# Altium PCB 8ch_RGB_Controller.PcbDoc (part 1 of 2)
Units mm, origin at the board's own origin, x right, y up, seen from the top; angles counter-clockwise.
Board outline 60 x 60 mm, 2 copper layers (Top Layer, Bottom Layer), stack 0.781 mm thick; 107 components, 106 nets, 314 pads, 0 vias.
Unrouted connection lines stored in the file: 228.
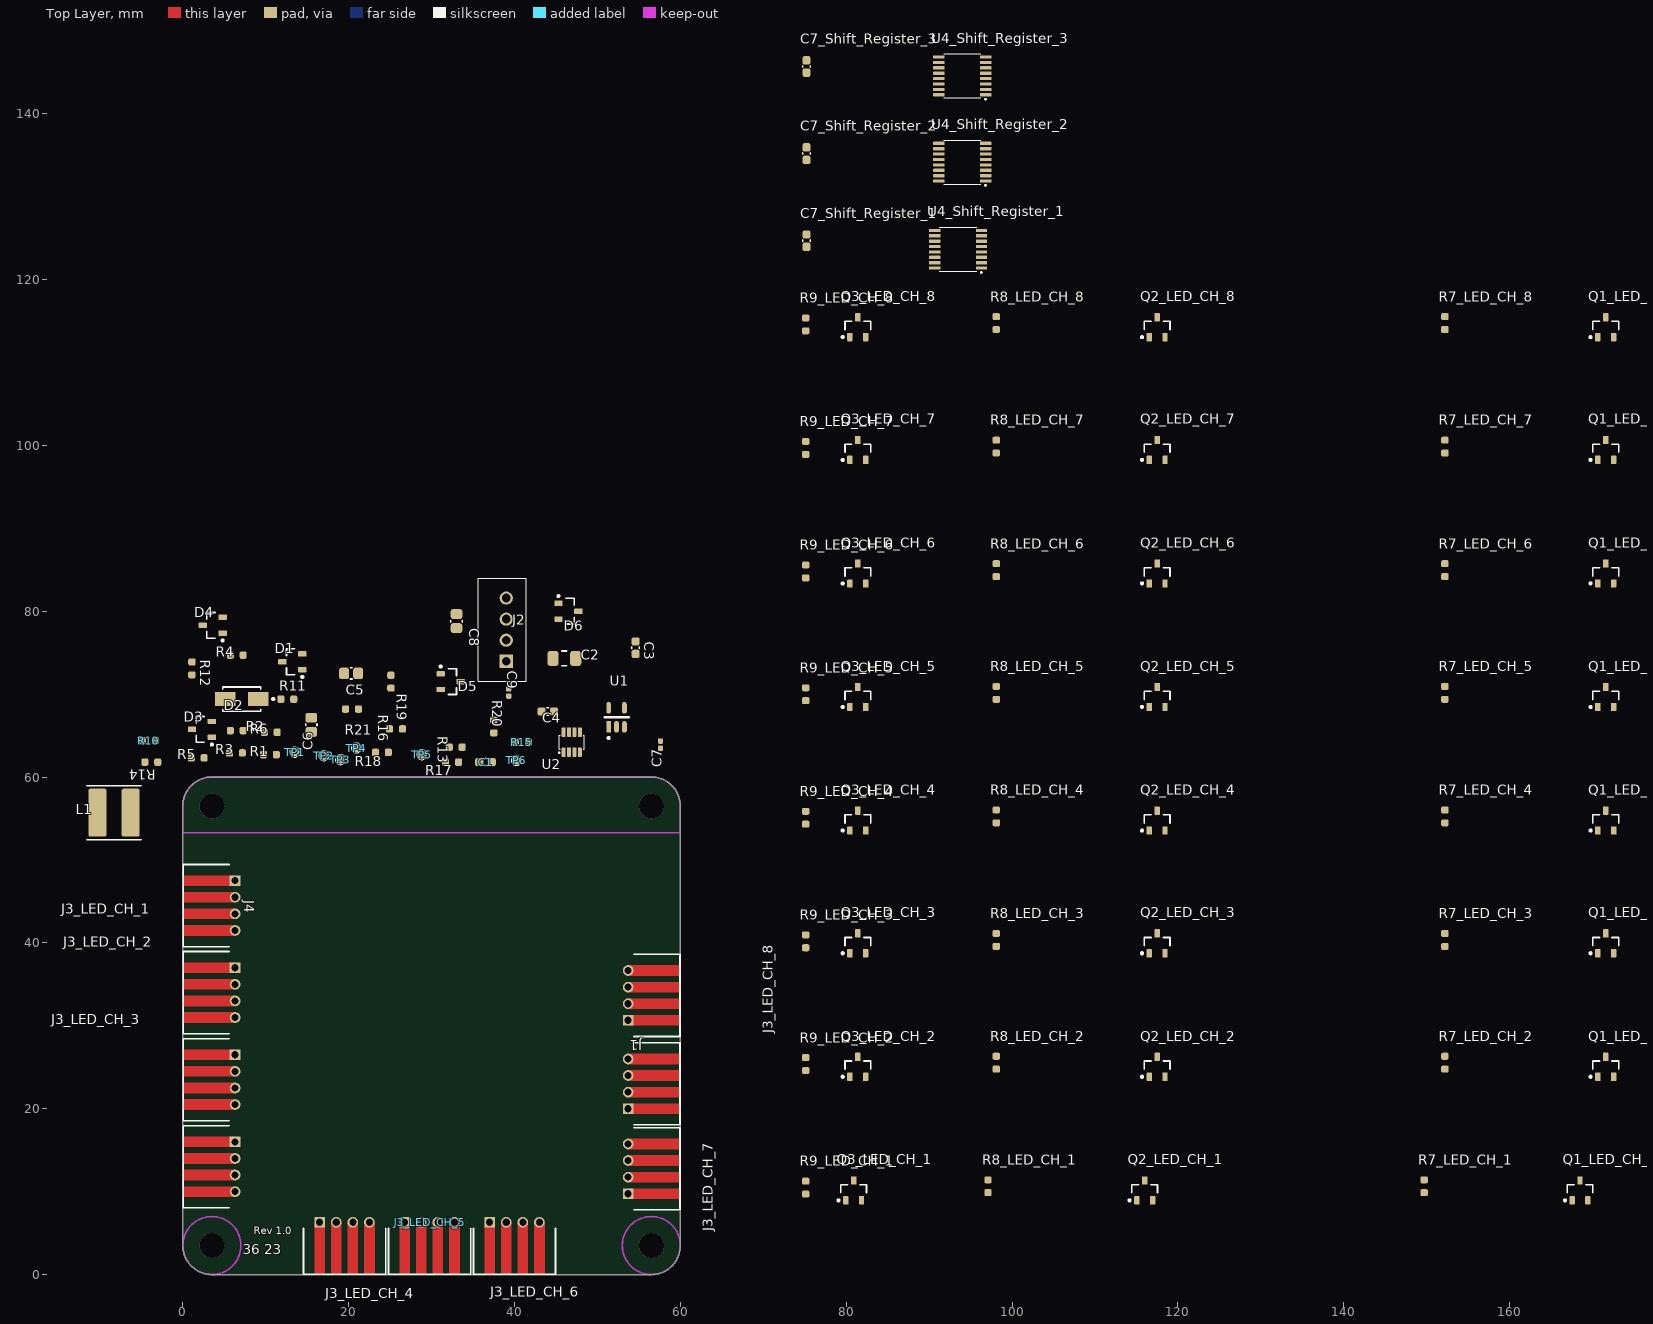
[diagram p0: Top Layer view]
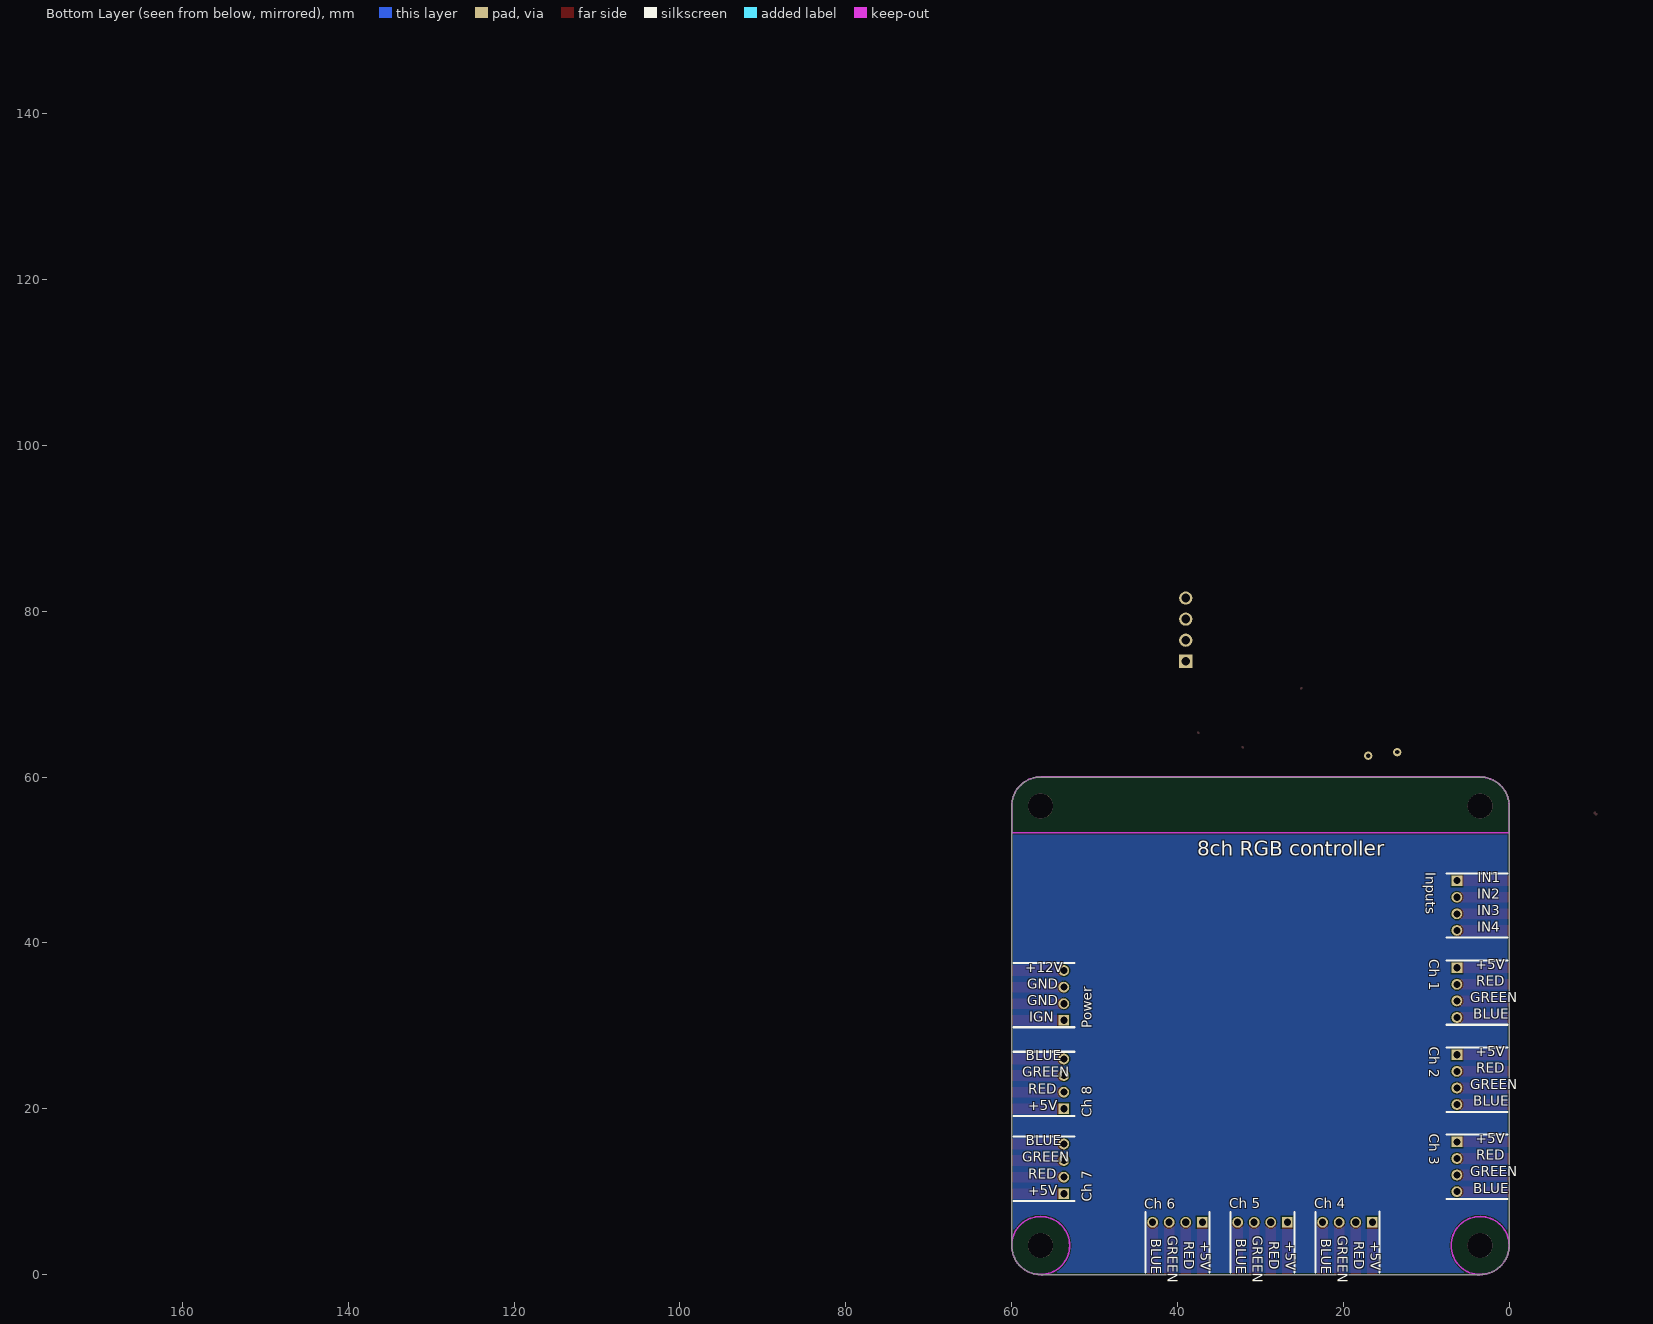
[diagram p1: Bottom Layer view, seen from below]

## Layer stack, top to bottom
Top Solder: solder mask 0.0102, Solder Resist, Dk 3.5
Top Layer: signal copper 0.035
Dielectric 1: core 0.7112, Core-039, Dk 4.8
Bottom Layer: signal copper 0.035
Bottom Solder: solder mask 0.0102, Solder Resist, Dk 3.5

## Board outline
0.001,3.5 0.001,56.5 0,56.5 cw(c3.5,56.5) 3.5,60 3.5,59.999 56.5,59.999 56.5,60 cw(c56.5,56.5) 60,56.5 60,3.5 cw(c56.5,3.5) 56.5,0 3.5,0 cw(c3.5,3.5)

## Design rules (kind name [scope] priority, off if disabled: settings)
BoardOutlineClearance [All] p1: gap=0.2 ignorepadtopadclearanceinfootprint=FALSE
Clearance [All] p1: gap=0.127 ignorepadtopadclearanceinfootprint=FALSE except(0.25: Arc-Hole Track-Hole SMDPad-Hole THPad-Hole Via-Hole Fill-Hole Poly-Hole Region-Hole Text-Hole)
ComponentClearance [All] p1: gap=0.127 collisioncheckmode=3 verticalgap=0.127 showdistances=TRUE
DiffPairsRouting [All] p1: maxlimit=0.254 minlimit=0.127 mostfreqgap=0.127 toplayer_minwidth=0.127 toplayer_maxwidth=25.4 toplayer_prefwidth=0.127 bottomlayer_minwidth=0.127 bottomlayer_maxwidth=25.4 bottomlayer_prefwidth=0.127 maxuncoupledlength=12.7
Height [All] p1: minheight=0 maxheight=1816.048 prefheight=12.7
HoleSize [All] p1: absolutevalues=TRUE maxlimit=6.3 minlimit=0.3 maxpercent=80.000 minpercent=20.000
HoleToHoleClearance [All] p1: gap=0.25 allowstackedmicrovias=FALSE
MinimumAnnularRing [All] p1: minimumring=0.076
MinimumSolderMaskSliver [All] p1: minsoldermaskwidth=0
PlaneClearance [All] p1: clearance=0.127
PlaneConnect PlaneConnectPowerPads [InPadClass('PowerPads')] p1: planeconnectstyle=Direct reliefexpansion=0.508 reliefentries=4 reliefconductorwidth=0.254 reliefairgap=0.254
PlaneConnect [All] p2: pad.planeconnectstyle=Relief pad.reliefexpansion=0.3 pad.reliefentries=4 pad.reliefconductorwidth=0.127 pad.reliefairgap=0.127 via.planeconnectstyle=Direct via.reliefexpansion=0.3 via.reliefentries=4 via.reliefconductorwidth=0.127 via.reliefairgap=0.127
PolygonConnect PolygonConnectPowerPads [All vs (InPadClass('PowerPads'))] p1: connectstyle=Direct reliefconductorwidth=0.254 reliefentries=4 polygonreliefangle="90 Angle" airgapwidth=0.254
PolygonConnect [All] p2: thpad.connectstyle=Relief thpad.reliefconductorwidth=0.127 thpad.reliefentries=4 thpad.polygonreliefangle="90 Angle" thpad.airgapwidth=0.127 smdpad.connectstyle=Relief smdpad.reliefconductorwidth=0.127 smdpad.reliefentries=4 smdpad.polygonreliefangle="90 Angle" smdpad.airgapwidth=0.127 via.connectstyle=Direct via.reliefconductorwidth=0.127 via.reliefentries=4 via.polygonreliefangle="90 Angle" via.airgapwidth=0.127
RoutingVias [All] p1: holewidth=0.3 width=0.6 viastyle="Through Hole" minholewidth=0.3 minwidth=0.6 maxholewidth=0.6 maxwidth=6.6
SilkToSilkClearance [All] p1: silktosilkclearance=0
SilkToSolderMaskClearance [IsPad] p1: minsilkscreentomaskgap=0.127 clearancetoexposedcopper=TRUE
SolderMaskExpansion [All] p1: expansion=0.075 istentingtop=FALSE
Width [All] p1: maxlimit=25.4 minlimit=0.127 preferedwidth=0.127 minimp=50.000000 maximp=50.000000 favimp=50.000000
20 further rules are at their usual default settings.

## Classes and differential pairs
channel class Shift_Register: Shift_Register_1 Shift_Register_2 Shift_Register_3
component class Shift_Register_3: C7_Shift_Register_3 U4_Shift_Register_3
component class Shift_Register_2: C7_Shift_Register_2 U4_Shift_Register_2
component class Shift_Register_1: C7_Shift_Register_1 U4_Shift_Register_1
channel class LED_CH: LED_CH_1 LED_CH_2 LED_CH_3 LED_CH_4 LED_CH_5 LED_CH_6 LED_CH_7 LED_CH_8
component class MCU: C7 C8 C9 J2
component class LED_CH_8: J3_LED_CH_8 Q1_LED_CH_8 Q2_LED_CH_8 Q3_LED_CH_8 R7_LED_CH_8 R8_LED_CH_8 R9_LED_CH_8
component class LED_CH_7: J3_LED_CH_7 Q1_LED_CH_7 Q2_LED_CH_7 Q3_LED_CH_7 R7_LED_CH_7 R8_LED_CH_7 R9_LED_CH_7
component class LED_CH_6: J3_LED_CH_6 Q1_LED_CH_6 Q2_LED_CH_6 Q3_LED_CH_6 R7_LED_CH_6 R8_LED_CH_6 R9_LED_CH_6
component class LED_CH_5: J3_LED_CH_5 Q1_LED_CH_5 Q2_LED_CH_5 Q3_LED_CH_5 R7_LED_CH_5 R8_LED_CH_5 R9_LED_CH_5
component class LED_CH_4: J3_LED_CH_4 Q1_LED_CH_4 Q2_LED_CH_4 Q3_LED_CH_4 R7_LED_CH_4 R8_LED_CH_4 R9_LED_CH_4
component class LED_CH_3: J3_LED_CH_3 Q1_LED_CH_3 Q2_LED_CH_3 Q3_LED_CH_3 R7_LED_CH_3 R8_LED_CH_3 R9_LED_CH_3
component class LED_CH_2: J3_LED_CH_2 Q1_LED_CH_2 Q2_LED_CH_2 Q3_LED_CH_2 R7_LED_CH_2 R8_LED_CH_2 R9_LED_CH_2
component class LED_CH_1: J3_LED_CH_1 Q1_LED_CH_1 Q2_LED_CH_1 Q3_LED_CH_1 R7_LED_CH_1 R8_LED_CH_1 R9_LED_CH_1
component class Analog: D3 D4 D5 D6 J4 R10 R11 R12 R13 R14 R15 R16 R17 R18 R19 R20 R21 TP3 TP4 TP5 TP6
component class Power: C1 C2 C3 C4 C5 C6 D1 D2 J1 L1 R2 R3 R4 R5 R6 TP1 TP2 U1 U2

## Components (designator, comment, footprint, x,y, rotation, side; value= is the part's Value field where it differs from the comment)
C1 "GRM185R61C105KE44D" CAPC1608X08N 36.5,61.8 r180 top
C2 "CL31A106KAHNNNE" CAPC3216X16N 46,74.3 r180 top
C3 "CC0603KRX7R9BB103" CAPC1608X08N 54.6,75.6 r90 top
C4 "GRM185R61C105KE44D" CAPC1608X08N 44,67.9 r180 top
C5 "CL21B106KOQNNNE" CAPC2012X13N 20.3,72.5 r180 top
C6 "CL21B106KOQNNNE" CAPC2012X13N 15.5,66.3 r90 top
C7 "CC0402KRX7R7BB104" CAPC1005X05N 57.6,63.9 r270 top
C7_Shift_Register_1 "CL10B104KO8NNNC" CAPC1608X08N 75.212,124.688 r90 top (schematic designator C7)
C7_Shift_Register_2 "CL10B104KO8NNNC" CAPC1608X08N 75.212,135.188 r90 top (schematic designator C7)
C7_Shift_Register_3 "CL10B104KO8NNNC" CAPC1608X08N 75.212,145.687 r90 top (schematic designator C7)
C8 "CL21B106KOQNNNE" CAPC2012X13N 33,78.8 r270 top
C9 "CC0402KRX7R7BB104" CAPC1005X05N 39.3,70.2 r270 top
D1 "BAT54SLT1G" SOT95P237X112-3N 13.2,73.9 r180 top
D2 "B330A-13-F" FP-SMA-MFG 7.1,69.4 r180 top value=200pF
D3 "BAV99LT1G" SOT95P237X112-3N 2.3,65.75 r180 top
D4 "BAV99LT1G" SOT95P237X112-3N 3.6,78.3 r180 top
D5 "BAV99LT1G" SOT95P237X112-3N 32.3,71.5 r0 top
D6 "BAV99LT1G" SOT95P237X112-3N 46.5,80 r0 top
J1 "S4B-PH-K-S" S4B-PH-K-S 53.7,30.665 r90 top
J2 "B4B-XH-A(LF)(SN)" B4B-XH-A 39,73.96 r90 top
J3_LED_CH_1 "S4B-PH-K-S" S4B-PH-K-S 6.3,37 r270 top (schematic designator J3)
J3_LED_CH_2 "S4B-PH-K-S" S4B-PH-K-S 6.3,26.5 r270 top (schematic designator J3)
J3_LED_CH_3 "S4B-PH-K-S" S4B-PH-K-S 6.3,16 r270 top (schematic designator J3)
J3_LED_CH_4 "S4B-PH-K-S" S4B-PH-K-S 16.5,6.3 r0 top (schematic designator J3)
J3_LED_CH_5 "S4B-PH-K-S" S4B-PH-K-S 26.75,6.3 r0 top (schematic designator J3)
J3_LED_CH_6 "S4B-PH-K-S" S4B-PH-K-S 37,6.3 r0 top (schematic designator J3)
J3_LED_CH_7 "S4B-PH-K-S" S4B-PH-K-S 53.7,9.75 r90 top (schematic designator J3)
J3_LED_CH_8 "S4B-PH-K-S" S4B-PH-K-S 53.7,20 r90 top (schematic designator J3)
J4 "S4B-PH-K-S" S4B-PH-K-S 6.3,47.5 r270 top
L1 "CMLF0504-2R2MTT" INDP5852X48N -8.3,55.7 r180 top
Q1_LED_CH_1 "AO3400A" SOT95P237X112-3N 168.499,10.15 r90 top (schematic designator Q1)
Q1_LED_CH_2 "AO3400A" SOT95P237X112-3N 171.599,25.05 r90 top (schematic designator Q1)
Q1_LED_CH_3 "AO3400A" SOT95P237X112-3N 171.599,39.95 r90 top (schematic designator Q1)
Q1_LED_CH_4 "AO3400A" SOT95P237X112-3N 171.599,54.75 r90 top (schematic designator Q1)
Q1_LED_CH_5 "AO3400A" SOT95P237X112-3N 171.599,69.65 r90 top (schematic designator Q1)
Q1_LED_CH_6 "AO3400A" SOT95P237X112-3N 171.599,84.55 r90 top (schematic designator Q1)
Q1_LED_CH_7 "AO3400A" SOT95P237X112-3N 171.599,99.45 r90 top (schematic designator Q1)
Q1_LED_CH_8 "AO3400A" SOT95P237X112-3N 171.599,114.25 r90 top (schematic designator Q1)
Q2_LED_CH_1 "AO3400A" SOT95P237X112-3N 115.999,10.15 r90 top (schematic designator Q2)
Q2_LED_CH_2 "AO3400A" SOT95P237X112-3N 117.499,25.05 r90 top (schematic designator Q2)
Q2_LED_CH_3 "AO3400A" SOT95P237X112-3N 117.499,39.95 r90 top (schematic designator Q2)
Q2_LED_CH_4 "AO3400A" SOT95P237X112-3N 117.499,54.75 r90 top (schematic designator Q2)
Q2_LED_CH_5 "AO3400A" SOT95P237X112-3N 117.499,69.65 r90 top (schematic designator Q2)
Q2_LED_CH_6 "AO3400A" SOT95P237X112-3N 117.499,84.55 r90 top (schematic designator Q2)
Q2_LED_CH_7 "AO3400A" SOT95P237X112-3N 117.499,99.45 r90 top (schematic designator Q2)
Q2_LED_CH_8 "AO3400A" SOT95P237X112-3N 117.499,114.25 r90 top (schematic designator Q2)
Q3_LED_CH_1 "AO3400A" SOT95P237X112-3N 80.899,10.15 r90 top (schematic designator Q3)
Q3_LED_CH_2 "AO3400A" SOT95P237X112-3N 81.399,25.05 r90 top (schematic designator Q3)
Q3_LED_CH_3 "AO3400A" SOT95P237X112-3N 81.399,39.95 r90 top (schematic designator Q3)
Q3_LED_CH_4 "AO3400A" SOT95P237X112-3N 81.399,54.75 r90 top (schematic designator Q3)
Q3_LED_CH_5 "AO3400A" SOT95P237X112-3N 81.399,69.65 r90 top (schematic designator Q3)
Q3_LED_CH_6 "AO3400A" SOT95P237X112-3N 81.399,84.55 r90 top (schematic designator Q3)
Q3_LED_CH_7 "AO3400A" SOT95P237X112-3N 81.399,99.45 r90 top (schematic designator Q3)
Q3_LED_CH_8 "AO3400A" SOT95P237X112-3N 81.399,114.25 r90 top (schematic designator Q3)
R1 "RC0603FR-13100KL" RESC1608X06N#1 10.5,62.7 r180 top
R2 "RC0603FR-0749R9L" RESC1608X06N#1 6.5,65.6 r180 top
R3 "RC0603FR-13100KL" RESC1608X06N#1 6.4,62.9 r180 top
R4 "RC0603FR-0713K7L" RESC1608X06N#1 6.5,74.7 r180 top
R5 "RC0603FR-074K99P" RESC1608X06N#1 1.8,62.3 r0 top
R6 "RC0603JR-0710KL" RESC1608X06N#1 10.6,65.4 r0 top
R7_LED_CH_1 "RC0603JR-0710KL" RESC1608X06N#1 149.699,10.65 r90 top (schematic designator R7)
R7_LED_CH_2 "RC0603JR-0710KL" RESC1608X06N#1 152.199,25.55 r90 top (schematic designator R7)
R7_LED_CH_3 "RC0603JR-0710KL" RESC1608X06N#1 152.199,40.35 r90 top (schematic designator R7)
R7_LED_CH_4 "RC0603JR-0710KL" RESC1608X06N#1 152.199,55.25 r90 top (schematic designator R7)
R7_LED_CH_5 "RC0603JR-0710KL" RESC1608X06N#1 152.199,70.15 r90 top (schematic designator R7)
R7_LED_CH_6 "RC0603JR-0710KL" RESC1608X06N#1 152.199,84.95 r90 top (schematic designator R7)
R7_LED_CH_7 "RC0603JR-0710KL" RESC1608X06N#1 152.199,99.85 r90 top (schematic designator R7)
R7_LED_CH_8 "RC0603JR-0710KL" RESC1608X06N#1 152.199,114.75 r90 top (schematic designator R7)
R8_LED_CH_1 "RC0603JR-0710KL" RESC1608X06N#1 97.099,10.65 r90 top (schematic designator R8)
R8_LED_CH_2 "RC0603JR-0710KL" RESC1608X06N#1 98.099,25.55 r90 top (schematic designator R8)
R8_LED_CH_3 "RC0603JR-0710KL" RESC1608X06N#1 98.099,40.35 r90 top (schematic designator R8)
R8_LED_CH_4 "RC0603JR-0710KL" RESC1608X06N#1 98.099,55.25 r90 top (schematic designator R8)
R8_LED_CH_5 "RC0603JR-0710KL" RESC1608X06N#1 98.099,70.15 r90 top (schematic designator R8)
R8_LED_CH_6 "RC0603JR-0710KL" RESC1608X06N#1 98.099,84.95 r90 top (schematic designator R8)
R8_LED_CH_7 "RC0603JR-0710KL" RESC1608X06N#1 98.099,99.85 r90 top (schematic designator R8)
R8_LED_CH_8 "RC0603JR-0710KL" RESC1608X06N#1 98.099,114.75 r90 top (schematic designator R8)
R9_LED_CH_1 "RC0603JR-0710KL" RESC1608X06N#1 75.112,10.488 r90 top (schematic designator R9)
R9_LED_CH_2 "RC0603JR-0710KL" RESC1608X06N#1 75.112,25.388 r90 top (schematic designator R9)
R9_LED_CH_3 "RC0603JR-0710KL" RESC1608X06N#1 75.112,40.188 r90 top (schematic designator R9)
R9_LED_CH_4 "RC0603JR-0710KL" RESC1608X06N#1 75.112,55.088 r90 top (schematic designator R9)
R9_LED_CH_5 "RC0603JR-0710KL" RESC1608X06N#1 75.112,69.988 r90 top (schematic designator R9)
R9_LED_CH_6 "RC0603JR-0710KL" RESC1608X06N#1 75.112,84.788 r90 top (schematic designator R9)
R9_LED_CH_7 "RC0603JR-0710KL" RESC1608X06N#1 75.112,99.688 r90 top (schematic designator R9)
R9_LED_CH_8 "RC0603JR-0710KL" RESC1608X06N#1 75.112,114.588 r90 top (schematic designator R9)
R10 "RC0603FR-073K3L" RESC1608X06N#1 -4.1,64.4 r180 top
R11 "RC0603FR-073K3L" RESC1608X06N#1 12.6,69.4 r180 top
R12 "RC0603FR-073K3L" RESC1608X06N#1 1.1,73.1 r90 top
R13 "RC0603FR-073K3L" RESC1608X06N#1 32.9,63.6 r180 top
R14 "RC0603FR-071K24L" RESC1608X06N#2 -3.8,61.8 r0 top
R15 "RC0603FR-071K24L" RESC1608X06N#1 40.9,64.2 r180 top
R16 "RC0603FR-071K24L" RESC1608X06N#1 25.7,65.8 r180 top
R17 "RC0603FR-071K24L" RESC1608X06N#1 32.475,61.8 r180 top
R18 "RC0603JR-07100RL" RESC1608X06N#1 24,62.964 r0 top
R19 "RC0603JR-07100RL" RESC1608X06N#1 25.1,71.5 r270 top
R20 "RC0603JR-07100RL" RESC1608X06N#1 37.5,66.1 r270 top
R21 "RC0603JR-07100RL" RESC1608X06N#1 20.4,68.2 r180 top
TP1 "TP_TH_1MM" TP_TH_1MM_N 13.5,63 r90 top
TP2 "TP_TH_1MM" TP_TH_1MM_N 17,62.573 r90 top
TP3 "TP_SMD_1MM" TP_SMD_1MM_N 19,62.1 r90 top
TP4 "TP_SMD_1MM" TP_SMD_1MM_N 20.9,63.5 r90 top
TP5 "TP_SMD_1MM" TP_SMD_1MM_N 28.8,62.7 r90 top
TP6 "TP_SMD_1MM" TP_SMD_1MM_N 40.2,62 r90 top
U1 "AP2204K-3.3TRG1" FP-SOT25-IPC_B 52.3,67.2 r90 top
U2 "SY8303AIC" SOT65P280X110-8N 46.9,64.2 r0 top
U4_Shift_Register_1 "74HC595PW,118" SOP65P640X110-16N 93.499,123.65 r90 top (schematic designator U4)
U4_Shift_Register_2 "74HC595PW,118" SOP65P640X110-16N 93.999,134.15 r90 top (schematic designator U4)
U4_Shift_Register_3 "74HC595PW,118" SOP65P640X110-16N 93.999,144.55 r90 top (schematic designator U4)

## Footprints (in the part's own frame and the unit in brackets; to place one, negate y for a bottom-side part, rotate by r counter-clockwise, add the part's x,y. Pads: shape width x height; smd on the part's side, far side on the other; paste and mask are expansions set on the pad)
B4B-XH-A [mm] "Header, Vertical Shrouded, 2.54 mm pitch; 0.64 mm lead width, 4 pins, 1 row, 4 pins per row, 12.40 mm L X 5.75 mm W X 7.00 mm H body"
  rect 1.59x1.59 / inner round 1.59 / far side rect 1.59x1.59 hole 1.06: 1(0,0)
  round 1.59 hole 1.06 paste-2539.97: 2(2.54,0) 3(5.08,0) 4(7.62,0)
  silkscreen extent -2.39,-2.4 10.01,3.4, body extent -2.4,-2.38 10,3.38, height 7
CAPC1005X05N [mm] "Chip Capacitor, 2-Leads, Body 1.00x0.50mm, IPC Medium Density"
  rrect50% 0.66x0.62 smd: 1(-0.44,0) 2(0.44,0)
  body extent -0.55,-0.3 0.55,0.3, height 0.6
CAPC1608X08N [mm] "Chip Capacitor, 2-Leads, Body 1.60x0.80mm, IPC Medium Density"
  rrect50% 1x0.95 smd: 1(-0.75,0) 2(0.75,0)
  silkscreen extent -0.1,-0.45 0.1,0.45, body extent -0.85,-0.45 0.85,0.45, height 0.9
CAPC2012X13N [mm] "Chip Capacitor, 2-Leads, Body 2.00x1.25mm, IPC Medium Density"
  rrect50% 1.2x1.4 smd: 1(-0.85,0) 2(0.85,0)
  silkscreen extent -0.1,-0.67 0.1,0.67, body extent -1.05,-0.67 1.05,0.67, height 1.35
CAPC3216X16N [mm] "Chip Capacitor, 2-Leads, Body 3.20x1.60mm, IPC Medium Density"
  rrect50% 1.35x1.8 smd: 1(-1.375,0) 2(1.375,0)
  silkscreen extent -0.3,-0.9 0.3,0.9, body extent -1.7,-0.9 1.7,0.9, height 1.8
FP-SMA-MFG [mm]
  rect 2.5x1.7 smd paste+0 mask+0: 1(-2,0) 2(2,0)
  silkscreen extent -3.93,-1.46 2.3,1.46, body extent -3.35,-1.56 3.35,1.56, height 0.25
FP-SOT25-IPC_B [mm]
  rect 1.407x0.576 smd paste+0 mask+0: 1(-1.151,0.95)
  rrect100% 1.407x0.576 smd paste+0 mask+0: 2(-1.151,0) 3(-1.151,-0.95) 4(1.151,-0.95) 5(1.151,0.95)
  silkscreen extent -2.6,-1.5 0.05,1.5, body extent -2.1,-1.75 2.1,1.75, height 0.25
INDP5852X48N [mm] "Precision Wire Wound Inductor, 2-Leads, Body 5,80x5,20mm, IPC Medium Density"
  rrect25% 2.2x5.8 smd: 1(-2,0) 2(2,0)
  silkscreen extent -3.25,-3.25 3.25,3.25, body extent -2.96,-2.6 2.96,2.6, height 4.5
RESC1608X06N#1 [mm] "Chip Resistor, 2-Leads, Body 1,60x0,80mm, IPC Medium Density"
  rrect50% 0.85x0.9 smd: 1(-0.775,0) 2(0.775,0)
  body extent -0.85,-0.45 0.85,0.45, height 0.55
RESC1608X06N#2 [mm] "Chip Resistor, 2-Leads, Body 1,60x0,80mm, IPC Medium Density"
  rrect50% 0.85x0.9 smd mask-0.9: 1(-0.775,0) 2(0.775,0)
  body extent -0.85,-0.45 0.85,0.45, height 0.55
S4B-PH-K-S [mm] "Header, Right Angle Shrouded, 2.00 mm pitch; 0.50 mm lead width, 4 pins, 1 row, 4 pins per row, 9.90 mm L X 7.60 mm W X 4.80 mm H body"
  rect 1.29x1.29 / inner round 1.29 / far side rect 1.29x1.29 hole 0.86 paste-2539.97: 1(0,0)
  round 1.29 hole 0.86 paste-2539.97: 2(2,0) 3(4,0) 4(6,0)
  silkscreen extent -1.95,-6.25 7.95,-0.71, body extent -1.95,-6.25 7.95,1.35, height 4.8
SOP65P640X110-16N [mm] "Small Outline Pkg (SOP), 0.65 mm pitch; 16 pin, 5.00 mm L X 4.40 mm W X 1.10 mm H body"
  rrect25% 0.39x1.37 smd: 1(-2.275,-2.82) 2(-1.625,-2.82) 3(-0.975,-2.82) 4(-0.325,-2.82) 5(0.325,-2.82) 6(0.975,-2.82) 7(1.625,-2.82) 8(2.275,-2.82) 9(2.275,2.82) 10(1.625,2.82) 11(0.975,2.82) 12(0.325,2.82) 13(-0.325,2.82) 14(-0.975,2.82) 15(-1.625,2.82) 16(-2.275,2.82)
  silkscreen extent -2.87,-2.87 2.65,2.25, body extent -2.55,-3.3 2.55,3.3, height 1.1
SOT65P280X110-8N [mm] "Small Outline Transistor (SOT23), 0.65 mm pitch; 8 pin, 2.90 mm L X 1.60 mm W X 1.10 mm H body"
  rrect25% 0.47x1.11 smd: 1(-0.975,-1.205) 2(-0.325,-1.205) 3(0.325,-1.205) 4(0.975,-1.205) 5(0.975,1.205) 6(0.325,1.205) 7(-0.325,1.205) 8(-0.975,1.205)
  silkscreen extent -1.57,-1.32 1.53,0.85, body extent -1.53,-1.5 1.53,1.5, height 1.1
SOT95P237X112-3N [mm] "SOT23, 3-Leads, Body 2,93x2,37mm, Pitch 0,95mm, IPC Medium Density"
  rrect25% 1x0.65 smd: 1(-1.2,0.95) 2(-1.2,-0.95) 3(1.2,0)
  silkscreen extent -1.33,-1.55 0.7,1.95, body extent -1.32,-1.53 1.32,1.53, height 1.12
TP_SMD_1MM_N [mm] "TP_SMD_1MM"
  round 1 smd paste-10 mask+0.05: 1(0,0)
  silkscreen extent -0.6,-0.6 0.6,0.6
TP_TH_1MM_N [mm] "TP_TH_1MM"
  round 1 hole 0.5 paste-2539.97 mask+0.05: 1(0,0)
  silkscreen extent -0.6,-0.6 0.6,0.6

## Part data
C1 C4: library part CMP-178-0007-2, "GRM185R61C105KE44D <CA", Capacitance=1µF, Case Code (Imperial)=0603, Case Code (Metric)=1608, Dielectric=X5R, Manufacturer=Murata, Max Operating Temperature=85°C, Min Operating Temperature=-55°C, Package Quantity=1, Tolerance=10%, Voltage=16V, Case/Package=0603, Depth=800µm, Dielectric Material=X5R, Height=500µm, Lead Free="Lead Free", Length=1.6mm, Manufacturer Part Number=GRM185R61C105KE44D, Mount="Surface Mount", Number of Pins=2, Packaging="Tape and Reel", Radiation Hardening=No, REACH SVHC="No SVHC", Termination=SMD/SMT, Thickness=508µm, Voltage Rating=16V, Voltage Rating (DC)=16V, Width=800µm
C2: library part CMP-178-0009-1, "CAP CER 10UF 25V X5R 1206", Capacitance=10µF, Case Code (Imperial)=1206, Case Code (Metric)=3216, Dielectric=X5R, Manufacturer="Samsung Electro-Mechanics", Max Operating Temperature=85°C, Min Operating Temperature=-55°C, Tolerance=10%, Voltage=25V, Case/Package=1206, Contact Plating=Tin, Depth=1.6mm, Dielectric Material=X5R, Height=1.6mm, Lead Free="Lead Free", Length=3.2mm, Manufacturer Part Number=CL31A106KAHNNNE, Mount="Surface Mount", Number of Pins=2, Packaging="Tape and Reel", Radiation Hardening=No, Thickness=1.8034mm, Voltage Rating=25V, Voltage Rating (DC)=25V, Width=1.6002mm
C3: library part CMP-178-0014-1, "10nF ±10% 50V X7R 0603 Multilayer Ceramic Capacitors MLCC - SMD/SMT RoHS", Capacitance=10nF, Case Code (Imperial)=0603, Case Code (Metric)=1608, Dielectric=X7R, Insulation Resistance=100G, Manufacturer=Yageo, Max Operating Temperature=125°C, Min Operating Temperature=-55°C, Package Quantity=1, Tolerance=10%, Voltage=50V, Case/Package=0603, Depth=800µm, Halogen Free="Halogen Free", Height=800µm, Lead Free="Lead Free", Length=1.6mm, Manufacturer Part Number=CC0603KRX7R9BB103, Mount="Surface Mount", Number of Pins=2, Packaging="Tape and Reel", Radiation Hardening=No, REACH SVHC="No SVHC", Termination=SMD/SMT, Thickness=889µm, Voltage Rating=50V, Voltage Rating (DC)=50V, Width=787.4µm
C5 C6 C8: library part CMP-178-0005-2, "SAMSUNG ELECTRO-MECHANICS - CL21B106KOQNNNE. - CAP, 10UF, 16V, MLCC, 0805", Capacitance=10µF, Case Code (Imperial)=0805, Case Code (Metric)=2012, Dielectric=X7R, Manufacturer="SAMSUNG ELECTRO-MECHANICS", Max Operating Temperature=125°C, Min Operating Temperature=-55°C, Package Quantity=1, Tolerance=10%, Voltage=16V, Case/Package=0805, Contact Plating=Tin, Depth=1.25mm, Dielectric Material=X7R, Height=1.25mm, Length=2mm, Manufacturer Part Number=CL21B106KOQNNNE, Mount="Surface Mount", Number of Pins=2, Packaging="Tape and Reel", Radiation Hardening=No, Thickness=1.397mm, Voltage Rating=16V, Voltage Rating (DC)=16V, Width=1.2446mm
C7 C9: library part CMP-178-0017-1, "100nF ±10% 16V X7R 0402 Multilayer Ceramic Capacitors MLCC - SMD/SMT RoHS", Capacitance=100nF, Case Code (Imperial)=0402, Case Code (Metric)=1005, Dielectric=X7R, Manufacturer=Yageo, Max Operating Temperature=125°C, Min Operating Temperature=-55°C, Package Quantity=1, Tolerance=10%, Voltage=16V, Case/Package=0402, Depth=500µm, Halogen Free="Halogen Free", Height=500µm, Lead Free="Lead Free", Length=1mm, Manufacturer Part Number=CC0402KRX7R7BB104, Mount="Surface Mount", Number of Pins=2, Packaging="Tape and Reel", Radiation Hardening=No, REACH SVHC="No SVHC", Termination=SMD/SMT, Thickness=558.8µm, Voltage Rating=16V, Voltage Rating (DC)=16V, Width=508µm
C7_Shift_Register_1 C7_Shift_Register_2 C7_Shift_Register_3: library part CMP-178-0002-5, "SAMSUNG ELECTRO-MECHANICS - CL10B104KO8NNNC - SMD Multilayer Ceramic Capacitor, 0.1 µF, 16 V, 0603 [1608 Metric], ± 10%, X7R, CL Series", Capacitance=100nF, Case Code (Imperial)=0603, Case Code (Metric)=1608, Dielectric=X7R, Manufacturer="SAMSUNG ELECTRO-MECHANICS", Max Operating Temperature=125°C, Min Operating Temperature=-55°C, Package Quantity=1, Tolerance=10%, Voltage=16V, Case/Package=0603, Contact Plating=Tin, Depth=800µm, Dielectric Material=X7R, Height=800µm, Lead Free="Lead Free", Length=1.6mm, Manufacturer Part Number=CL10B104KO8NNNC, Mount="Surface Mount", Number of Pins=2, Packaging="Tape and Reel", Radiation Hardening=No, Thickness=889µm, Voltage Rating=16V, Voltage Rating (AC)=16V, Voltage Rating (DC)=16V, Width=787.4µm
D1: library part CMP-119-0000-3, "ON SEMICONDUCTOR - BAT54SLT1G - Small Signal Schottky Diode, Dual Series, 30 V, 200 mA, 400 mV, 600 mA, 150 C RoHS Compliant: Yes", Average Rectified Current=200mA, Capacitance=10pF, Case/Package=SOT-23-3, Forward Voltage=800mV, Manufacturer=OnSemi, Max Forward Surge Current (Ifsm)=600mA, Max Operating Temperature=150°C, Max Repetitive Reverse Voltage (Vrrm)=30V, Max Reverse Leakage Current=2µA, Min Operating Temperature=-55°C, Package Quantity=3000, Peak Non-Repetitive Surge Current=1A, Power Dissipation=225mW, Contact Plating=Tin,Matte, Current Rating=200mA, Element Configuration=Dual, Forward Current=200mA, Halogen Free="Halogen Free", Height=940µm, Lead Free="Lead Free", Length=2.9mm, Manufacturer Part Number=BAT54SLT1G, Max Reverse Voltage (DC)=30V, Max Surge Current=600mA, Mount=SMT, Number of Pins=3, Packaging="Tape and Reel", Peak Reverse Current=2µA, Radiation Hardening=No, REACH SVHC="No SVHC", Recovery Time=5ns, Reverse Recovery Time=5ns, Voltage=30V, Voltage Rating (DC)=30V, Width=1.3mm
D2: library part CMP-2000-05896-2, "DIODE SCHOTTKY 30V 3A SMA", Capacitance=200pF, Dc Blocking Voltage=30V, Forward Current=3A, Manufacturer=Diodes, Max Junction Temp=+150°C, Max Surge Forward Current=80A, Package=SMA, Peak Reverse Current=0.5mA, Temperature="-55°C to +150°C", Temperature Range Low=-55°C, Automotive=Yes, Automotive Grade="Grade 0", Category=Diode, ComponentLink2Description=Datasheet, ComponentLink2URL=https://www.diodes.com/assets/Datasheets/ds30891.pdf, Device Class L1="Discrete Semiconductors", Device Class L2=Diodes, Device Class L3="Schottky Diodes", Digikey Description="DIODE SCHOTTKY 30V 3A SMA", Footprint Url=https://www.diodes.com/assets/Package-Files/SMA.pdf, Height=2.4mm, Lead Free=Yes, Manufacturer Part Number=B330A-13-F, Max Repetitive Reverse Voltage=30V, Mouser Description="Schottky Diodes & Rectifiers 30V 3A", Octopart=https://octopart.com/b330a-13-f-diodes+inc.-325808, Reverse Voltage=30V, RoHS=TRUE, Standoff Height=0.05mm, Temperature Range High=+150°C, Working Reverse Voltage=30V
D3 D4 D5 D6: library part CMP-120-0001-3, "Diode Small Signal Switching 100V 0.215A Automotive 3-Pin SOT-23 T/R", Capacitance=1.5pF, Case/Package=SOT-23, Current Rating=200mA, Forward Current=150mA, Forward Voltage=1.25V, Manufacturer="ON Semiconductor", Max Forward Surge Current (Ifsm)=500mA, Max Operating Temperature=150°C, Max Repetitive Reverse Voltage (Vrrm)=70V, Min Operating Temperature=-65°C, Peak Non-Repetitive Surge Current=2A, Peak Reverse Current=2.5uA, Height=940µm, Lead Free="Lead Free", Length=2.9mm, Manufacturer Part Number=BAV99LT1G, Mount="Surface Mount", Number of Pins=3, Packaging="Tape and Reel", REACH SVHC="No SVHC", Reverse Recovery Time=6ns, Voltage Rating (DC)=70V, Width=1.3mm
J1 J3_LED_CH_1 J3_LED_CH_2 J3_LED_CH_3 J3_LED_CH_4 J3_LED_CH_5 J3_LED_CH_6 J3_LED_CH_7 J3_LED_CH_8 J4: library part CMP-00003-3, "JST (JAPAN SOLDERLESS TERMINALS) - S4B-PH-K-S (LF)(SN) - CONNECTOR, HEADER, 2MM, 4 POSITION, 1ROW", Color=Natural,White, Contact Resistance=10m, Current=2A, Flammability Rating="UL94 V-0", Housing Color=Natural, Insulation Resistance=1G, Max Operating Temperature=85°C, Max Voltage Rating (AC)=100V, Min Operating Temperature=-25°C, Connector Type="Male Pin", Contact Material=Tin,Brass,Bronze, Contact Mating Length=0.13inch, Contact Plating=Tin, Current Rating=2A, Fastening Type=Detent, Gender=Male, Height=9.4mm, Lead Free="Lead Free", Lead Pitch=2mm, Length=9.9mm, Max Current Rating=2A, Max Voltage Rating (DC)=100V, Mount="Through Hole", Number of Contacts=4, Number of Pins=4, Number of Poles=4, Number of Positions=4, Number of Rows=1, Operating Supply Voltage=100V, Orientation="Right Angle", Packaging=Bulk, Pitch=2mm, REACH SVHC="No SVHC", Termination=Solder, Voltage=100V, Voltage Rating=100V, Voltage Rating (AC)=100V, Voltage Rating (DC)=100V, Width=4.5mm, Working Voltage=100V
J2: library part CMP-00006-1, "JST (JAPAN SOLDERLESS TERMINALS) - B4B-XH-A (LF)(SN) - Wire-To-Board-Steckverbinder, vertikal, 2.5 mm, 4 Kontakt(e), Stiftleiste, Baureihe XH", Color=Natural, Contact Resistance=2m, Current=3A, Housing Color=White, Insulation Resistance=1G, Max Operating Temperature=85°C, Max Voltage Rating (AC)=250V, Min Operating Temperature=-25°C, Package Quantity=500, Connector Type="Male Pin", Contact Material=Brass, Contact Plating=Tin,Copper,Lead, Current Rating=3A, Depth=5.75mm, Gender=Male, Housing Material=Polyamide, Lead Free="Lead Free", Lead Pitch=2.5mm, Length=12.4mm, Material=Polyamide, Max Current Rating=3A, Max Voltage Rating (DC)=250V, Mount="Through Hole", Number of Contacts=4, Number of Positions=4, Number of Rows=1, Orientation=Straight, Packaging=Bulk, Pitch=2.5mm, REACH SVHC="No SVHC", Termination=Press-Fit, Voltage Rating=250V, Voltage Rating (AC)=250V, Wire/Cable Gauge=22AWG
L1: library part CMP-167-0004-1, "2.2uH ±20% 4.8A 35mΩ SMD,5.8x5.2x4.5mm Power Inductors RoHS", Case/Package=5.8*5.2*4.5, Current=3.8A, DC Resistance (DCR)=35m, Inductance=2.2µH, Inductance Tolerance=20%, Manufacturer=Cybermax, RMS Current (Irms)=3A, Core Material=Ferrite, Current Rating=3.8A, DC Current=3.8A, Height=4.5mm, Height - Seated (Max)=4.5mm, Length=5.8mm, Manufacturer Part Number=CMLF0504-2R2MTT, Max DC Current=3.8A, Mount=SMT, Number of Pins=2, Saturation Current=3.8A, Tolerance=20%, Width=5.2mm
Q1_LED_CH_1 Q1_LED_CH_2 Q1_LED_CH_3 Q1_LED_CH_4 Q1_LED_CH_5 Q1_LED_CH_6 Q1_LED_CH_7 Q1_LED_CH_8 Q2_LED_CH_1 Q2_LED_CH_2 Q2_LED_CH_3 Q2_LED_CH_4 Q2_LED_CH_5 Q2_LED_CH_6 Q2_LED_CH_7 Q2_LED_CH_8 Q3_LED_CH_1 Q3_LED_CH_2 Q3_LED_CH_3 Q3_LED_CH_4 Q3_LED_CH_5 Q3_LED_CH_6 Q3_LED_CH_7 Q3_LED_CH_8: library part CMP-111-0000-3, "Trans MOSFET N-CH 30V 5.7A 3-Pin SOT-23", Case/Package=SOT-23, Continuous Drain Current (ID)=5.7A, Drain to Source Voltage (Vdss)=30V, Gate to Source Voltage (Vgs)=12V, Input Capacitance=630pF, Manufacturer="Alpha & Omega Semiconductor", Max Operating Temperature=150°C, Max Power Dissipation=1.4W, Min Operating Temperature=-55°C, Lead Free="Lead Free", Manufacturer Part Number=AO3400A, Mount="Surface Mount", Number of Elements=1, Number of Pins=3, Packaging="Tape and Reel", Power Dissipation=1.4W, Radiation Hardening=No, Rds On Max=26.5m
R1: library part CMP-186-0032-2, "Res Thick Film 0603 100K Ohm 1% 0.1W(1/10W) ±100ppm/C Pad SMD T/R", Case Code (Imperial)=0603, Case Code (Metric)=1608, Manufacturer=Yageo, Max Operating Temperature=155°C, Min Operating Temperature=-55°C, Power Rating=100mW, Resistance=100k, Resistor Type="Thick Film", Temperature Coefficient=100ppm/°C, Tolerance=1%, Voltage Rating=50V, Case/Package=0603, Depth=800µm, Height=450µm, Lead Free="Lead Free", Length=1.6mm, Manufacturer Part Number=RC0603FR-13100KL, Military Standard=Not, Mount=SMT, Number of Contacts=2, Number of Pins=2, Number of Terminations=2, Packaging="Tape and Reel", REACH SVHC=Unknown, Termination=SMD/SMT, Voltage Rating (DC)=50V, Width=800µm
R2: library part CMP-186-0012-3, "Yageo RC Series Thick Film Surface Mount Resistor 0603 Case 49.9 1% 0.1W 100ppm/C", Case Code (Imperial)=0603, Case Code (Metric)=1608, Manufacturer=Yageo, Max Operating Temperature=155°C, Min Operating Temperature=-55°C, Power Rating=100mW, Resistance=49.9, Temperature Coefficient=100ppm/°C, Tolerance=1%, Voltage Rating=50V, Case/Package=0603, Composition="Thick Film", Depth=800µm, Height=450µm, Lead Free="Lead Free", Length=1.6mm, Manufacturer Part Number=RC0603FR-0749R9L, Military Standard=Not, Number of Pins=2, Packaging="Tape and Reel", REACH SVHC="No SVHC", Termination=SMD/SMT, Voltage Rating (DC)=50V
R3: library part CMP-186-0032-1, "Res Thick Film 0603 100K Ohm 1% 0.1W(1/10W) ±100ppm/C Pad SMD T/R", Case Code (Imperial)=0603, Case Code (Metric)=1608, Manufacturer=Yageo, Max Operating Temperature=155°C, Min Operating Temperature=-55°C, Power Rating=100mW, Resistance=100k, Resistor Type="Thick Film", Temperature Coefficient=100ppm/°C, Tolerance=1%, Voltage Rating=50V, Case/Package=0603, Depth=800µm, Height=450µm, Lead Free="Lead Free", Length=1.6mm, Manufacturer Part Number=RC0603FR-13100KL, Military Standard=Not, Mount=SMT, Number of Contacts=2, Number of Pins=2, Number of Terminations=2, Packaging="Tape and Reel", REACH SVHC=Unknown, Termination=SMD/SMT, Voltage Rating (DC)=50V, Width=800µm
R4: library part CMP-186-0033-1, "13.7kΩ ±1% 0.1W ±100ppm/℃ 0603 Chip Resistor - Surface Mount RoHS", Case Code (Imperial)=0603, Case Code (Metric)=1608, Manufacturer=Yageo, Max Operating Temperature=155°C, Min Operating Temperature=-55°C, Power Rating=100mW, Resistance=13.7k, Temperature Coefficient=100ppm/°C, Tolerance=1%, Voltage Rating=75V, Voltage Rating (DC)=50V, Case/Package=0603, Depth=800µm, Height=450µm, Lead Free="Lead Free", Length=1.6mm, Manufacturer Part Number=RC0603FR-0713K7L, Military Standard=Not, Mount=SMT, Number of Contacts=2, Number of Pins=2, Number of Terminations=2, Packaging="Tape and Reel", Termination=SMD/SMT, Weight=2.0128mg, Width=800µm
R5: library part CMP-186-0039-2, "Res Thick Film 0603 4.99K Ohm 1% 0.1W(1/10W) ±150ppm/C Epoxy Pad SMD T/R", Case Code (Imperial)=0603, Case Code (Metric)=1608, Manufacturer=Yageo, Max Operating Temperature=155°C, Max Power Dissipation=100mW, Min Operating Temperature=-55°C, Resistance=4.99k, Temperature Coefficient=150ppm/°C, Tolerance=1%, Case/Package=0603, Features="Moisture Resistant", Height=558.8µm, Length=1.6002mm, Manufacturer Part Number=RC0603FR-074K99P, Mount=SMT, Number of Contacts=2, Number of Pins=2, Number of Terminations=2, Packaging="Tape and Reel", Power Rating=100mW, Width=787.4µm
R6: library part CMP-186-0006-4, "Surface Mount Thick Film Resistor, RC Series, 10 kohm, 100 mW, - 5%, 50 V, 0603 [1608 Metric]", Case Code (Imperial)=0603, Case Code (Metric)=1608, Manufacturer=Yageo, Max Operating Temperature=155°C, Max Power Dissipation=100mW, Min Operating Temperature=-55°C, Resistance=10k, Temperature Coefficient=100ppm/°C, Tolerance=5%, Voltage Rating=50V, Case/Package=0603, Composition="Thick Film", Contact Plating=Tin,Matte, Depth=800µm, Features="Moisture Resistant", Lead Free="Lead Free", Length=1.6002mm, Manufacturer Part Number=RC0603JR-0710KL, Military Standard=Not, Mount=SMT, Number of Contacts=2, Number of Pins=2, Number of Terminations=2, Packaging="Tape and Reel", Power Rating=100mW, Radiation Hardening=No, REACH SVHC=Unknown, Termination=SMD/SMT, Voltage Rating (DC)=50V, Width=787.4µm, Working Voltage=50V
R7_LED_CH_1 R7_LED_CH_2 R7_LED_CH_3 R7_LED_CH_4 R7_LED_CH_5 R7_LED_CH_6 R7_LED_CH_7 R7_LED_CH_8 R8_LED_CH_1 R8_LED_CH_2 R8_LED_CH_3 R8_LED_CH_4 R8_LED_CH_5 R8_LED_CH_6 R8_LED_CH_7 R8_LED_CH_8 R9_LED_CH_1 R9_LED_CH_2 R9_LED_CH_3 R9_LED_CH_4 R9_LED_CH_5 R9_LED_CH_6 R9_LED_CH_7 R9_LED_CH_8: library part CMP-186-0006-3, "Surface Mount Thick Film Resistor, RC Series, 10 kohm, 100 mW, - 5%, 50 V, 0603 [1608 Metric]", Case Code (Imperial)=0603, Case Code (Metric)=1608, Manufacturer=Yageo, Max Operating Temperature=155°C, Max Power Dissipation=100mW, Min Operating Temperature=-55°C, Resistance=10k, Temperature Coefficient=100ppm/°C, Tolerance=5%, Voltage Rating=50V, Case/Package=0603, Composition="Thick Film", Contact Plating=Tin,Matte, Depth=800µm, Features="Moisture Resistant", Lead Free="Lead Free", Length=1.6002mm, Manufacturer Part Number=RC0603JR-0710KL, Military Standard=Not, Mount=SMT, Number of Contacts=2, Number of Pins=2, Number of Terminations=2, Packaging="Tape and Reel", Power Rating=100mW, Radiation Hardening=No, REACH SVHC=Unknown, Termination=SMD/SMT, Voltage Rating (DC)=50V, Width=787.4µm, Working Voltage=50V
R10 R11 R12 R13: library part CMP-186-0020-2, "YAGEO - RC0603FR-073K3L - SMD Chip Resistor, 0603 [1608 Metric], 3.3 kohm, RC Series, 75 V, Thick Film, 100 mW", Case Code (Imperial)=0603, Case Code (Metric)=1608, Manufacturer=Yageo, Max Operating Temperature=155°C, Max Power Dissipation=100mW, Min Operating Temperature=-55°C, Package Quantity=1, Resistance=3.3k, Temperature Coefficient=100ppm/°C, Tolerance=1%, Voltage Rating=50V, Case/Package=0603, Composition="Thick Film", Depth=800µm, Features="Moisture Resistant", Height=450µm, Lead Free="Lead Free", Length=1.6mm, Manufacturer Part Number=RC0603FR-073K3L, Military Standard=Not, Number of Pins=2, Number of Terminations=2, Packaging="Tape and Reel", Power Rating=100mW, REACH SVHC="No SVHC", Termination=SMD/SMT, Voltage Rating (DC)=50V, Width=800µm
R14 R15 R16 R17: library part CMP-186-0019-2, "RES SMD 1.24K OHM 1% 1/10W 0603", Case Code (Imperial)=0603, Case Code (Metric)=1608, Manufacturer=Yageo, Max Operating Temperature=155°C, Max Power Dissipation=100mW, Min Operating Temperature=-55°C, Package Quantity=1, Resistance=1.24k, Temperature Coefficient=100ppm/°C, Tolerance=1%, Voltage Rating=50V, Case/Package=0603, Composition="Thick Film", Depth=800µm, Features="Moisture Resistant", Height=450µm, Lead Free="Lead Free", Length=1.6mm, Manufacturer Part Number=RC0603FR-071K24L, Military Standard=Not, Mount="Surface Mount", Number of Terminations=2, Packaging="Tape and Reel", Power Rating=100mW, Termination=SMD/SMT, Voltage Rating (DC)=50V, Width=787.4µm
R18 R19 R20 R21: library part CMP-186-0015-2, "Res Thick Film 0603 100 Ohm 5% 0.1W(1/10W) ±100ppm/C Molded SMD Paper T/R", Case Code (Imperial)=0603, Case Code (Metric)=1608, Manufacturer=Yageo, Max Operating Temperature=155°C, Min Operating Temperature=-55°C, Power Rating=100mW, Resistance=100, Temperature Coefficient=100ppm/°C, Tolerance=5%, Voltage Rating=50V, Case/Package=0603, Composition="Thick Film", Contact Plating=Tin,Matte, Depth=800µm, Lead Free="Lead Free", Length=1.6mm, Manufacturer Part Number=RC0603JR-07100RL, Military Standard=Not, Number of Pins=2, Packaging="Tape and Reel", Radiation Hardening=No, REACH SVHC=Unknown, Termination=SMD/SMT, Voltage Rating (DC)=50V, Width=800µm
TP1 TP2: library part CMP-001-0001-1, "Test point, 1mm, TH", Test signal=Test
TP3 TP4 TP5 TP6: library part CMP-001-0000-2, "Test point, 1mm, SMT", Test signal=Test
U1: library part CMP-2000-05782-2, "IC REG LINEAR 3.3V 150MA SOT23-5", Case/Package=SOT-23-5, Dropout Voltage=360mV, Max Input Voltage=24V, Max Operating Temperature=85°C, Max Output Current=250mA, Min Input Voltage=2.3V, Min Operating Temperature=-40°C, Output Current=150mA, Output Voltage=3.3V, Package Quantity=3000, Quiescent Current=50uA, Reference Voltage=1.24V, Height=1.3mm, Lead Free="Lead Free", Length=3.02mm, Mount="Surface Mount", Number of Outputs=1, Number of Pins=5, Number of Regulators=1, Output Type=Fixed, Packaging="Tape and Reel", Polarity=Positive, Weight=0.001058oz, Width=1.7mm
U2: library part CMP-126-0005-3, "High Efficiency, Fast Response, 3A, 40V Input, Synchronous Step Down Regulator", Case/Package=TSOT23-8, Current - Output 1=3A, Frequency=2.5MHz, Manufacturer=Silergy, Max Input Voltage=40V, Max Operating Temperature=105°C, Min Input Voltage=4.5V, Min Operating Temperature=-40°C, Efficiency=98, Height=1.1mm, Length=3mm, Manufacturer Part Number=SY8303AIC, Max Input Voltage (DC)=40V, Max Output Current=3A, Min Input Voltage (DC)=4.5V, Mount=SMT, Number of Outputs=1, Number of Pins=8, Output Current=3A, Width=3mm
U4_Shift_Register_1 U4_Shift_Register_2 U4_Shift_Register_3: library part CMP-139-0001-2, "74HC Series 6 V 3-St 8-Bit Serial-In Serial/Parallel-Out Shift Register-TSSOP-16", Case/Package=TSSOP, Frequency=100MHz, Manufacturer=NXP, Max Operating Temperature=125°C, Max Supply Voltage=6V, Min Operating Temperature=-40°C, Min Supply Voltage=2V, Operating Supply Voltage=5V, Package Quantity=2500, Quiescent Current=160µA, Contact Plating=Gold, Direction=Unidirectional, Height=6.35mm, Lead Free="Lead Free", Length=6.35mm, Logic Function="Shift Register", Manufacturer Part Number=74HC595PW,118, Mount="Surface Mount", Number of Bits=8, Number of Bits per Element=8, Number of Circuits=1, Number of Elements=1, Number of Input Lines=1, Number of Inputs=1, Number of Output Lines=3, Number of Outputs=8, Number of Pins=16, Packaging="Tape and Reel", Propagation Delay=30ns, Radiation Hardening=No, REACH SVHC="No SVHC", Turn-On Delay Time=265ns, Weight=113.3981g, Width=6.35mm

## Free pads (board coordinates)
  round 3 hole 3 unplated mask-3: MH(3.5,3.5) MH(3.5,56.5) MH(56.5,3.5) MH(56.5,56.5)

## Nets (pads, with @x,y where several pads share a name; then routed paths per layer and width w, separated by ;. In a path a pad name is that pad's centre, name@x,y a point inside that pad or via, vN(x,y) a via of type N, cw(c..) or ccw(c..) an arc to the next point about the centre after c; other vN are vias at no path point)
+3V3: C4.2 C7_Shift_Register_1.2 C7_Shift_Register_2.2 C7_Shift_Register_3.2 C8.1 C9.2 D3.2 D4.2 D5.2 D6.2 J2.1 TP1.1 U1.5 U4_Shift_Register_1.10 U4_Shift_Register_1.16 U4_Shift_Register_2.10 U4_Shift_Register_2.16 U4_Shift_Register_3.10 U4_Shift_Register_3.16
+5V: C5.1 C6.1 J3_LED_CH_1.1 J3_LED_CH_2.1 J3_LED_CH_3.1 J3_LED_CH_4.1 J3_LED_CH_5.1 J3_LED_CH_6.1 J3_LED_CH_7.1 J3_LED_CH_8.1 L1.2 R3.2 R5.2 TP2.1 | length 0.3
  Top Layer w0.3: L1.2@-10.5,55.5 L1.2
+12V: C2.1 D2.1 U2.5 U2.8
Analog1: R18.2 TP3.1
Analog2: R19.2 TP4.1 | length 0
  Top Layer w0.3: R19.2@25.075,70.725 R19.2
Analog3: R20.2 TP5.1 | length 0
  Top Layer w0.3: R20.2@37.5,65.31 R20.2
Analog4: R21.2 TP6.1
GND: C1.1 C2.2 C4.1 C5.2 C6.2 C7.2 C7_Shift_Register_1.1 C7_Shift_Register_2.1 C7_Shift_Register_3.1 C8.2 C9.1 D3.1 D4.1 D5.1 D6.1 J1.2 J1.3 J2.4 Q1_LED_CH_1.2 Q1_LED_CH_2.2 Q1_LED_CH_3.2 Q1_LED_CH_4.2 Q1_LED_CH_5.2 Q1_LED_CH_6.2 Q1_LED_CH_7.2 Q1_LED_CH_8.2 Q2_LED_CH_1.2 Q2_LED_CH_2.2 Q2_LED_CH_3.2 Q2_LED_CH_4.2 Q2_LED_CH_5.2 Q2_LED_CH_6.2 Q2_LED_CH_7.2 Q2_LED_CH_8.2 Q3_LED_CH_1.2 Q3_LED_CH_2.2 Q3_LED_CH_3.2 Q3_LED_CH_4.2 Q3_LED_CH_5.2 Q3_LED_CH_6.2 Q3_LED_CH_7.2 Q3_LED_CH_8.2 R1.1 R2.1 R4.1 R6.1 R7_LED_CH_1.1 R7_LED_CH_2.1 R7_LED_CH_3.1 R7_LED_CH_4.1 R7_LED_CH_5.1 R7_LED_CH_6.1 R7_LED_CH_7.1 R7_LED_CH_8.1 R8_LED_CH_1.1 R8_LED_CH_2.1 R8_LED_CH_3.1 R8_LED_CH_4.1 R8_LED_CH_5.1 R8_LED_CH_6.1 R8_LED_CH_7.1 R8_LED_CH_8.1 R9_LED_CH_1.1 R9_LED_CH_2.1 R9_LED_CH_3.1 R9_LED_CH_4.1 R9_LED_CH_5.1 R9_LED_CH_6.1 R9_LED_CH_7.1 R9_LED_CH_8.1 R14.2 R15.2 R16.2 R17.2 U1.2 U2.3 U2.4 U4_Shift_Register_1.8 U4_Shift_Register_1.13 U4_Shift_Register_2.8 U4_Shift_Register_2.13 U4_Shift_Register_3.8 U4_Shift_Register_3.13
LED_B_LED_CH_1: J3_LED_CH_1.4 Q3_LED_CH_1.3
LED_B_LED_CH_2: J3_LED_CH_2.4 Q3_LED_CH_2.3
LED_B_LED_CH_3: J3_LED_CH_3.4 Q3_LED_CH_3.3
LED_B_LED_CH_4: J3_LED_CH_4.4 Q3_LED_CH_4.3
LED_B_LED_CH_5: J3_LED_CH_5.4 Q3_LED_CH_5.3
LED_B_LED_CH_6: J3_LED_CH_6.4 Q3_LED_CH_6.3
LED_B_LED_CH_7: J3_LED_CH_7.4 Q3_LED_CH_7.3
LED_B_LED_CH_8: J3_LED_CH_8.4 Q3_LED_CH_8.3
LED_G_LED_CH_1: J3_LED_CH_1.3 Q2_LED_CH_1.3
LED_G_LED_CH_2: J3_LED_CH_2.3 Q2_LED_CH_2.3
LED_G_LED_CH_3: J3_LED_CH_3.3 Q2_LED_CH_3.3
LED_G_LED_CH_4: J3_LED_CH_4.3 Q2_LED_CH_4.3
LED_G_LED_CH_5: J3_LED_CH_5.3 Q2_LED_CH_5.3
LED_G_LED_CH_6: J3_LED_CH_6.3 Q2_LED_CH_6.3
LED_G_LED_CH_7: J3_LED_CH_7.3 Q2_LED_CH_7.3
LED_G_LED_CH_8: J3_LED_CH_8.3 Q2_LED_CH_8.3
LED_R_LED_CH_1: J3_LED_CH_1.2 Q1_LED_CH_1.3
LED_R_LED_CH_2: J3_LED_CH_2.2 Q1_LED_CH_2.3
LED_R_LED_CH_3: J3_LED_CH_3.2 Q1_LED_CH_3.3
LED_R_LED_CH_4: J3_LED_CH_4.2 Q1_LED_CH_4.3
LED_R_LED_CH_5: J3_LED_CH_5.2 Q1_LED_CH_5.3
LED_R_LED_CH_6: J3_LED_CH_6.2 Q1_LED_CH_6.3
LED_R_LED_CH_7: J3_LED_CH_7.2 Q1_LED_CH_7.3
LED_R_LED_CH_8: J3_LED_CH_8.2 Q1_LED_CH_8.3
NetC1_2: C1.2 D1.2 U1.1 U1.3
NetC3_1: C3.1 L1.1 U2.6
NetC3_2: C3.2 U2.7
NetC7_1: C7.1 R5.1 R6.2
NetD1_1: D1.1
NetD1_3: D1.3 J1.1
NetD2_2: D2.2 J1.4
NetD3_3: D3.3 R10.1 R14.1 R18.1
NetD4_3: D4.3 R11.1 R15.1 R19.1
NetD5_3: D5.3 R12.1 R16.1 R20.1
NetD6_3: D6.3 R13.1 R17.1 R21.1
NetJ4_1: J4.1 R10.2
NetJ4_2: J4.2 R11.2
NetJ4_3: J4.3 R12.2
NetJ4_4: J4.4 R13.2 | length 0
  Top Layer w0.3: R13.2@32.112,63.6 R13.2@32.125,63.587
NetQ1_LED_CH_1_1: Q1_LED_CH_1.1 R7_LED_CH_1.2 U4_Shift_Register_1.15
NetQ1_LED_CH_2_1: Q1_LED_CH_2.1 R7_LED_CH_2.2 U4_Shift_Register_1.3
NetQ1_LED_CH_3_1: Q1_LED_CH_3.1 R7_LED_CH_3.2 U4_Shift_Register_1.6
NetQ1_LED_CH_4_1: Q1_LED_CH_4.1 R7_LED_CH_4.2 U4_Shift_Register_2.1
NetQ1_LED_CH_5_1: Q1_LED_CH_5.1 R7_LED_CH_5.2 U4_Shift_Register_2.4
NetQ1_LED_CH_6_1: Q1_LED_CH_6.1 R7_LED_CH_6.2 U4_Shift_Register_2.7
NetQ1_LED_CH_7_1: Q1_LED_CH_7.1 R7_LED_CH_7.2 U4_Shift_Register_3.2
NetQ1_LED_CH_8_1: Q1_LED_CH_8.1 R7_LED_CH_8.2 U4_Shift_Register_3.5
NetQ2_LED_CH_1_1: Q2_LED_CH_1.1 R8_LED_CH_1.2 U4_Shift_Register_1.1
NetQ2_LED_CH_2_1: Q2_LED_CH_2.1 R8_LED_CH_2.2 U4_Shift_Register_1.4
NetQ2_LED_CH_3_1: Q2_LED_CH_3.1 R8_LED_CH_3.2 U4_Shift_Register_1.7
NetQ2_LED_CH_4_1: Q2_LED_CH_4.1 R8_LED_CH_4.2 U4_Shift_Register_2.2
NetQ2_LED_CH_5_1: Q2_LED_CH_5.1 R8_LED_CH_5.2 U4_Shift_Register_2.5
NetQ2_LED_CH_6_1: Q2_LED_CH_6.1 R8_LED_CH_6.2 U4_Shift_Register_3.15
NetQ2_LED_CH_7_1: Q2_LED_CH_7.1 R8_LED_CH_7.2 U4_Shift_Register_3.3
NetQ2_LED_CH_8_1: Q2_LED_CH_8.1 R8_LED_CH_8.2 U4_Shift_Register_3.6
NetQ3_LED_CH_1_1: Q3_LED_CH_1.1 R9_LED_CH_1.2 U4_Shift_Register_1.2
NetQ3_LED_CH_2_1: Q3_LED_CH_2.1 R9_LED_CH_2.2 U4_Shift_Register_1.5
NetQ3_LED_CH_3_1: Q3_LED_CH_3.1 R9_LED_CH_3.2 U4_Shift_Register_2.15
NetQ3_LED_CH_4_1: Q3_LED_CH_4.1 R9_LED_CH_4.2 U4_Shift_Register_2.3
NetQ3_LED_CH_5_1: Q3_LED_CH_5.1 R9_LED_CH_5.2 U4_Shift_Register_2.6
NetQ3_LED_CH_6_1: Q3_LED_CH_6.1 R9_LED_CH_6.2 U4_Shift_Register_3.1
NetQ3_LED_CH_7_1: Q3_LED_CH_7.1 R9_LED_CH_7.2 U4_Shift_Register_3.4
NetQ3_LED_CH_8_1: Q3_LED_CH_8.1 R9_LED_CH_8.2 U4_Shift_Register_3.7
NetR1_2: R1.2 U4_Shift_Register_1.12 U4_Shift_Register_2.12 U4_Shift_Register_3.12
NetR2_2: R2.2 U2.2
NetR3_1: R3.1 R4.2 U2.1
NetU1_4: U1.4
NetU3_8: 
NetU3_9: 
NetU3_10: 
NetU3_11: 
NetU3_12: 
NetU3_13: 
NetU3_14: 
NetU3_16: 
NetU3_17: 
NetU3_18: 
NetU3_19: 
NetU3_20: 
NetU3_21: 
NetU3_22: 
NetU3_23: 
NetU3_24: 
NetU3_25: 
NetU3_26: 
NetU3_27: 
NetU3_28: 
NetU3_30: U4_Shift_Register_1.11 U4_Shift_Register_2.11 U4_Shift_Register_3.11
NetU3_31: 
NetU3_32: 
NetU3_33: 
NetU3_36: 
NetU3_37: U4_Shift_Register_1.14
NetU4_Shift_Register_1_9: U4_Shift_Register_1.9 U4_Shift_Register_2.14
NetU4_Shift_Register_2_9: U4_Shift_Register_2.9 U4_Shift_Register_3.14
NetU4_Shift_Register_3_9: U4_Shift_Register_3.9
RX: J2.3
TX: J2.2

## Polygon pours and split planes (outlines as drawn)
GND on Bottom Layer "GND_L02_P003" (solid, remove dead copper, pour order 3): 0.001,3.5 0.001,56.5 0,56.5 cw(c3.5,56.5) 3.5,60 3.5,59.999 56.5,59.999 56.5,60 cw(c56.5,56.5) 60,56.5 60,3.5 cw(c56.5,3.5) 56.5,0 3.5,0 cw(c3.5,3.5)

## Keep-outs
Keep-Out Layer:
  circle w0.2: c3.5,3.5 r3.5
  circle w0.2: c56.5,3.5 r3.5
  lines w0.2: 0,53.29 60,53.29 60,56.5 ccw(c56.5,56.5) 56.5,60 3.5,60 ccw(c3.5,56.5) 0,56.5 ; 0.001,53.29 0.001,56.5

## Other copper
Top Layer:
  region net GND: 60,33.308 53.7,33.308 53.7,32.019 60,32.019
  region net GND: 60,35.308 53.7,35.308 53.7,34.019 60,34.019
  region net LED_R_LED_CH_6: 39.645,0 39.645,6.3 38.355,6.3 38.355,0
  region net NetD1_3: 60,31.309 53.7,31.309 53.7,30.019 60,30.019
  region net NetD2_2: 60,37.308 53.7,37.308 53.7,36.019 60,36.019
  region net LED_B_LED_CH_6: 43.645,0 43.645,6.3 42.355,6.3 42.355,0
  region net LED_G_LED_CH_6: 41.645,0 41.645,6.3 40.355,6.3 40.355,0
  region net +5V: 37.645,0 37.645,6.3 36.355,6.3 36.355,0
  region net LED_B_LED_CH_5: 33.395,0 33.395,6.3 32.105,6.3 32.105,0
  region net LED_G_LED_CH_5: 31.395,0 31.395,6.3 30.105,6.3 30.105,0
  region net LED_R_LED_CH_5: 29.395,0 29.395,6.3 28.105,6.3 28.105,0
  region net +5V: 27.395,0 27.395,6.3 26.105,6.3 26.105,0
  region net LED_B_LED_CH_4: 23.145,0 23.145,6.3 21.855,6.3 21.855,0
  region net LED_G_LED_CH_4: 21.145,0 21.145,6.3 19.855,6.3 19.855,0
  region net LED_R_LED_CH_4: 19.145,0 19.145,6.3 17.855,6.3 17.855,0
  region net +5V: 17.145,0 17.145,6.3 15.855,6.3 15.855,0
  region net +5V: 60,10.395 53.7,10.395 53.7,9.105 60,9.105
  region net LED_R_LED_CH_7: 60,12.395 53.7,12.395 53.7,11.105 60,11.105
  region net LED_G_LED_CH_7: 60,14.395 53.7,14.395 53.7,13.105 60,13.105
  region net LED_B_LED_CH_7: 60,16.395 53.7,16.395 53.7,15.105 60,15.105
  region net +5V: 60,20.645 53.7,20.645 53.7,19.355 60,19.355
  region net LED_R_LED_CH_8: 60,22.645 53.7,22.645 53.7,21.355 60,21.355
  region net LED_G_LED_CH_8: 60,24.645 53.7,24.645 53.7,23.355 60,23.355
  region net LED_B_LED_CH_8: 60,26.645 53.7,26.645 53.7,25.355 60,25.355
  rectangle net LED_B_LED_CH_3: 0,9.355 6.3,10.645
  rectangle net LED_G_LED_CH_3: 0,11.355 6.3,12.645
  rectangle net LED_R_LED_CH_3: 0,13.355 6.3,14.645
  rectangle net +5V: 0,15.355 6.3,16.645
  rectangle net LED_B_LED_CH_2: 0,19.855 6.3,21.145
  rectangle net LED_G_LED_CH_2: 0,21.855 6.3,23.145
  rectangle net LED_R_LED_CH_2: 0,23.855 6.3,25.145
  rectangle net +5V: 0,25.855 6.3,27.145
  rectangle net NetJ4_4: 0,40.855 6.3,42.145
  rectangle net NetJ4_3: 0,42.855 6.3,44.145
  rectangle net NetJ4_2: 0,44.855 6.3,46.145
  rectangle net NetJ4_1: 0,46.855 6.3,48.145
  rectangle net LED_B_LED_CH_1: 0,30.355 6.3,31.645
  rectangle net LED_G_LED_CH_1: 0,32.355 6.3,33.645
  rectangle net LED_R_LED_CH_1: 0,34.355 6.3,35.645
  rectangle net +5V: 0,36.355 6.3,37.645

## Silkscreen, mask and mechanical layers (free items; w line width, h text height)
Top Overlay:
  text "Rev 1.0" at 8.56,4.552 h1.5
  text "36 23" at 7.25,2 h2
Bottom Overlay:
  rectangle: 117.9,-9.2 146.4,-4.5
  region: 12.487,26.061 12.49,26.064 12.487,26.065 12.486,26.062
  region: 12.486,24.271 12.487,24.263 12.49,24.266 12.488,24.271 12.487,24.272
  region: 12.486,25.979 12.487,25.974 12.49,25.975 12.488,25.981 12.487,25.983 12.486,25.981
  lines w0.254: 0.2,40.625 7.525,40.625 ; 0.2,48.375 7.525,48.375 ; 0.225,9.125 7.55,9.125 ; 0.225,16.875 7.55,16.875 ; 0.225,19.625 7.55,19.625 ; 0.225,27.375 7.55,27.375 ; 0.225,30.125 7.55,30.125 ; 0.225,37.875 7.55,37.875 ; 15.625,0.25 15.625,7.575 ; 23.375,0.225 23.375,7.55 ; 25.875,0.225 25.875,7.55 ; 33.625,0.225 33.625,7.55 ; 36.125,0.225 36.125,7.55 ; 43.875,0.225 43.875,7.55 ; 52.45,8.875 59.775,8.875 ; 52.45,16.625 59.775,16.625 ; 52.45,19.125 59.775,19.125 ; 52.45,26.875 59.775,26.875 ; 52.45,29.825 59.775,29.825 ; 52.45,37.575 59.775,37.575
  text "8ch RGB controller" at 37.599,49.905 h3
  text "Inputs" at 10.472,48.5 h2 r90
  text "IN1" at 3.774,46.902 h2
  text "IN2" at 3.855,44.896 h2
  text "IN3" at 3.853,42.902 h2
  text "IN4" at 3.877,40.902 h2
  text "Ch 1" at 10.085,38 h2 r90
  text "+5V" at 4.003,36.407 h2
  text "+12V" at 58.349,36.046 h2
  text "RED" at 3.997,34.402 h2
  text "GND" at 58.109,34.053 h2
  text "GREEN" at 4.694,32.403 h2
  text "GND" at 58.109,32.053 h2
  text "BLUE" at 4.322,30.407 h2
  text "IGN" at 57.878,30.053 h2
  text "Power" at 49.94,29.7 h2 r270
  text "Ch 2" at 10.085,27.5 h2 r90
  text "+5V" at 4.003,25.907 h2
  text "BLUE" at 58.322,25.407 h2
  text "RED" at 3.997,23.902 h2
  text "GREEN" at 58.694,23.403 h2
  text "GREEN" at 4.694,21.903 h2
  text "RED" at 57.997,21.402 h2
  text "BLUE" at 4.322,19.907 h2
  text "+5V" at 58.003,19.407 h2
  text "Ch 8" at 49.94,19 h2 r270
  text "Ch 3" at 10.085,17 h2 r90
  text "+5V" at 4.003,15.407 h2
  text "BLUE" at 58.322,15.157 h2
  text "RED" at 3.997,13.402 h2
  text "GREEN" at 58.694,13.153 h2
  text "GREEN" at 4.694,11.403 h2
  text "RED" at 57.997,11.152 h2
  text "BLUE" at 4.322,9.407 h2
  text "+5V" at 58.003,9.157 h2
  text "Ch 7" at 49.94,8.75 h2 r270
  text "Ch 4" at 23.5,7.565 h2
  text "Ch 5" at 33.75,7.565 h2
  text "Ch 6" at 44,7.54 h2
  text "GREEN" at 21.097,4.694 h2 r90
  text "GREEN" at 31.347,4.694 h2 r90
  text "GREEN" at 41.597,4.694 h2 r90
  text "BLUE" at 23.093,4.322 h2 r90
  text "BLUE" at 33.343,4.322 h2 r90
  text "BLUE" at 43.593,4.322 h2 r90
  text "+5V" at 17.093,4.003 h2 r90
  text "+5V" at 27.343,4.003 h2 r90
  text "+5V" at 37.593,4.003 h2 r90
  text "RED" at 19.098,3.997 h2 r90
  text "RED" at 29.348,3.997 h2 r90
  text "RED" at 39.598,3.997 h2 r90
  text "CircuitCraftLab" at 78.527,-13.946 h1.5
Top Solder:
  circle w0.254: c56.5,3.5 r3.5
  region: 0,53 60,53 60,56.5 ccw(c56.5,56.5) 56.5,60 3.5,60 ccw(c3.5,56.5) 0,56.5 0.001,56.5
  region: 53,56.5 ccw(c56.5,56.5) 56.5,53 ccw(c56.5,56.5) 60,56.5 ccw(c56.5,56.5) 56.5,60 ccw(c56.5,56.5)
  region: 0,56.5 ccw(c3.5,56.5) 3.5,53 ccw(c3.5,56.5) 7,56.5 ccw(c3.5,56.5) 3.5,60 ccw(c3.5,56.5)
  region: 53,3.5 ccw(c56.5,3.5) 56.5,0 ccw(c56.5,3.5) 60,3.5 ccw(c56.5,3.5) 56.5,7 ccw(c56.5,3.5)
  region: 0,3.5 ccw(c3.5,3.5) 3.5,0 ccw(c3.5,3.5) 7,3.5 ccw(c3.5,3.5) 3.5,7 ccw(c3.5,3.5)
Bottom Solder:
  region: 0,52.999 60,52.999 60,56.499 ccw(c56.5,56.499) 56.5,59.999 3.5,59.999 ccw(c3.5,56.499) 0,56.499 0.001,56.499
  region: 0,56.5 ccw(c3.5,56.5) 3.5,53 ccw(c3.5,56.5) 7,56.5 ccw(c3.5,56.5) 3.5,60 ccw(c3.5,56.5)